# EAGLE board Cell_Board (EAGLE 5.08)
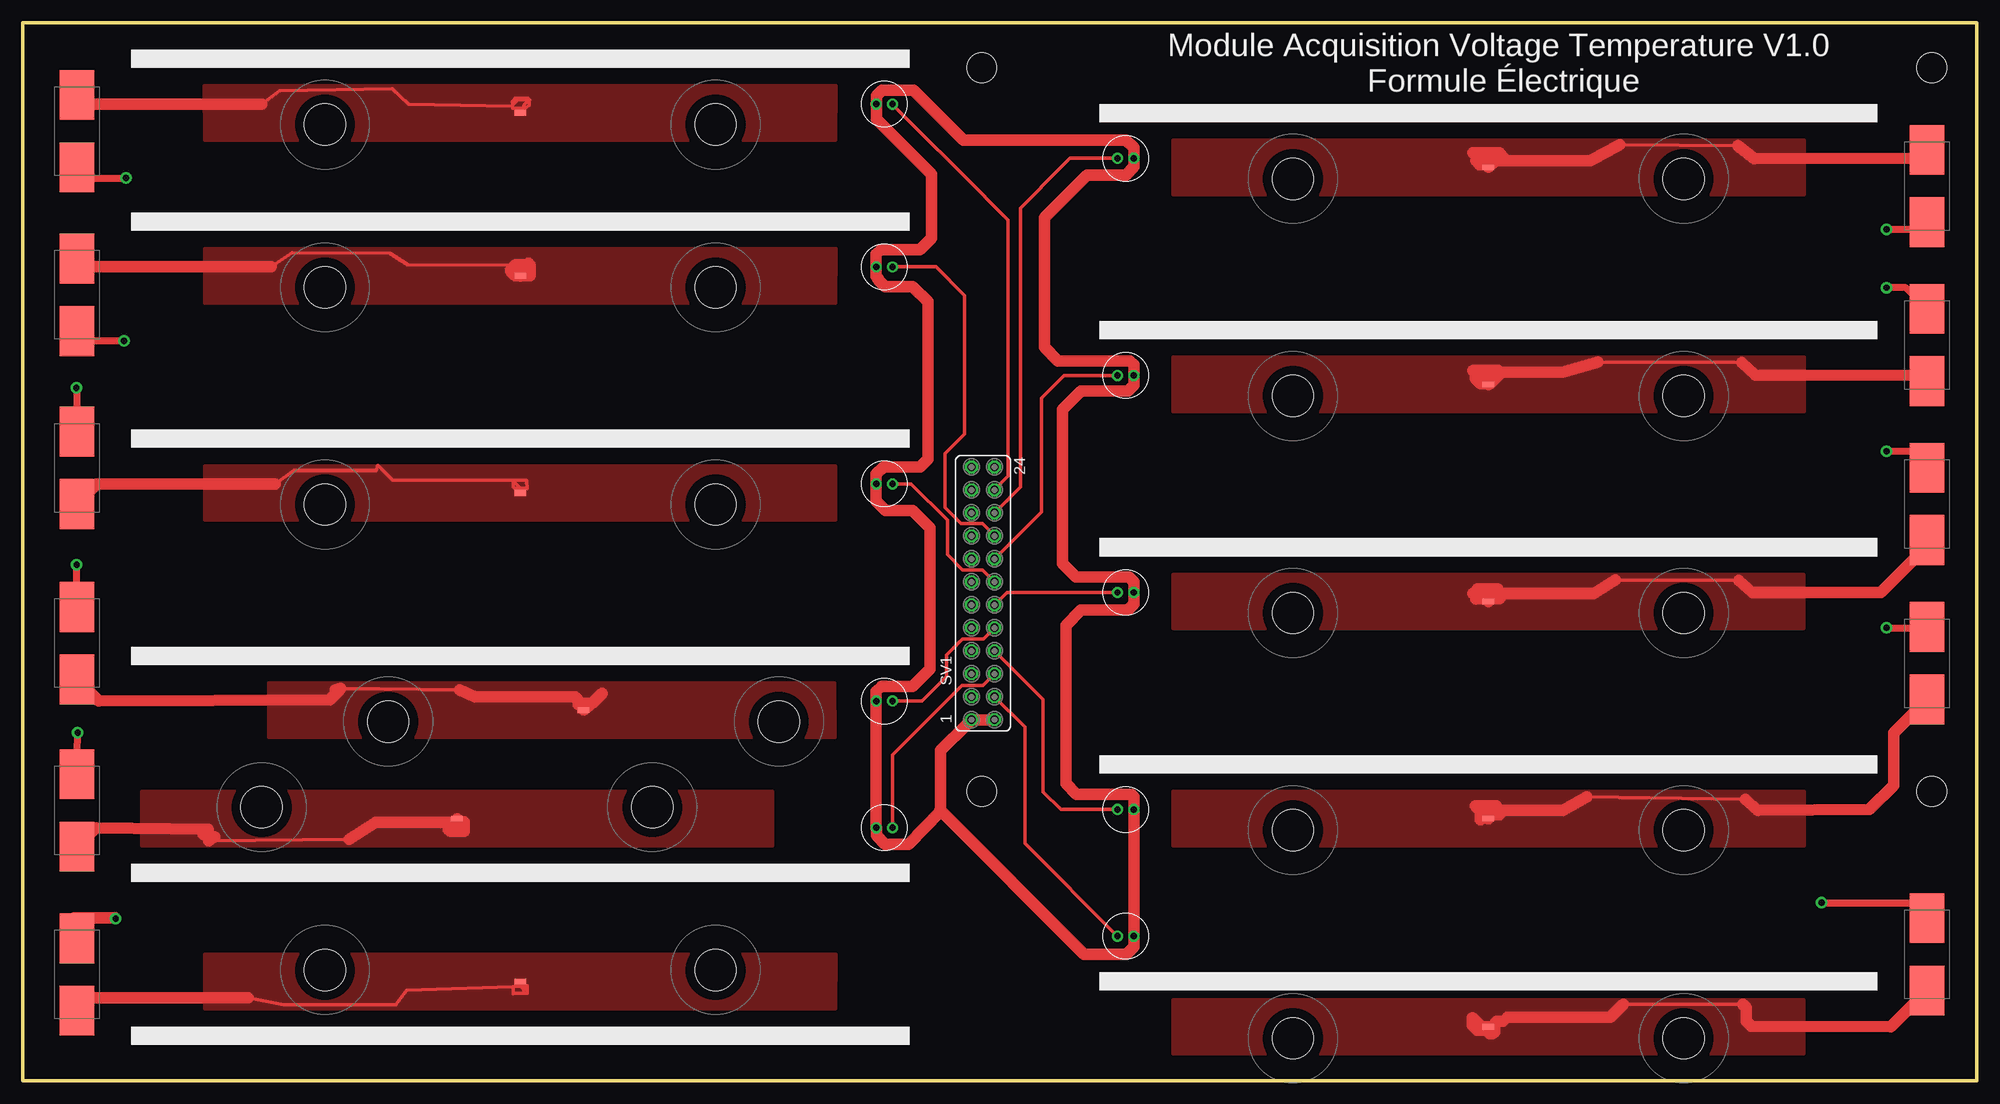
[diagram p0: board, top side]
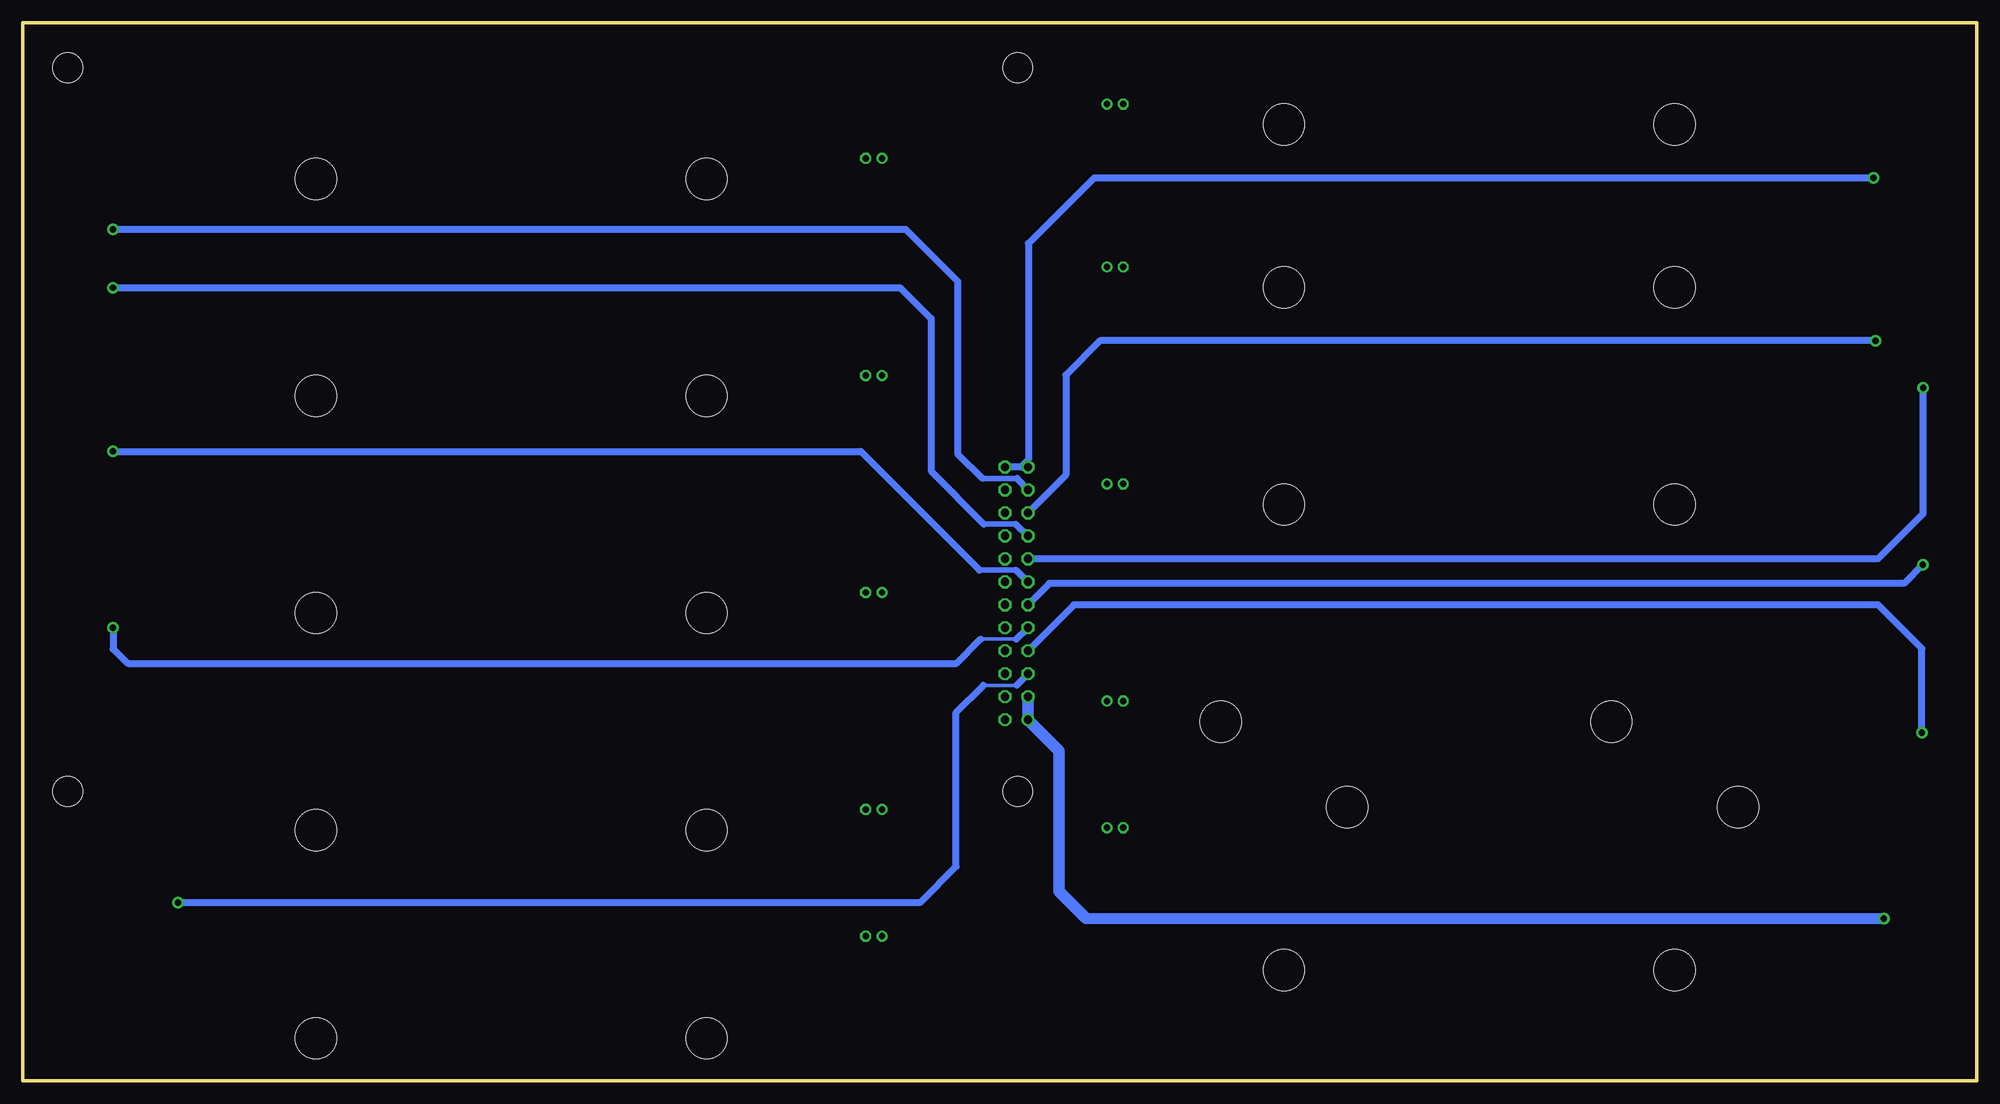
[diagram p1: board, bottom side, seen from below]

Size 216 x 117 mm. Coordinates in mm from the lower left corner, seen from the top.
Outline: 0,0 216,0 216,117 0,117 0,0
Copper layers (1*16): Top 0.035mm / dielectric 1.5mm / Bottom 0.035mm
Design rules "default *": minimum track width 10mil, minimum drill 23mil, track to track 8mil, track to pad 8mil, pad to pad 8mil, via to via 8mil, smd to smd 8mil, copper to edge 40mil, drill to drill 8mil, minimum pad ring 10mil, minimum via ring 8mil, stop-mask expansion 4mil, vias tented up to drill 0mil, thermal gap 10mil

## Footprints (pad centres in the part's own frame; a part is rotated, then mirrored left to right if it is on the bottom)
FE12-2 = drill 0.914 round: 1 -13.97,1.27 | drill 0.914 octagon: 2 -13.97,-1.27; 3 -11.43,1.27; 4 -11.43,-1.27; 5 -8.89,1.27; 6 -8.89,-1.27; 7 -6.35,1.27; 8 -6.35,-1.27; 9 -3.81,1.27; 10 -3.81,-1.27; 11 -1.27,1.27; 12 -1.27,-1.27; 13 1.27,1.27; 14 1.27,-1.27; 15 3.81,1.27; 16 3.81,-1.27; 17 6.35,1.27; 18 6.35,-1.27; 19 8.89,1.27; 20 8.89,-1.27; 21 11.43,1.27; 22 11.43,-1.27; 23 13.97,1.27; 24 13.97,-1.27
STAND-OFF = hole 3.302: 0,0
FUSEBLOCK = smd 5.5 x 3.81: PAD1 -4,0; PAD2 4,0
CELLPAD = smd 1.27 x 0.635: PAD 0,0 | hole 4.572: -21.59,-1.27; 21.59,-1.27
CELLPAD2 = smd 1.27 x 0.635: PAD 0,0 | hole 4.572: -21.59,-1.27; 21.59,-1.27
TERMISTANCE-JT = drill 0.7 octagon: PIN1 -0.9,0 | drill 0.7 round: PIN2 0.9,0

## Placement (x,y rotation side)
SV1  [FE12-2]  106.15,53.91 90 top
U$1  [STAND-OFF]  106,32 0 top
U$2  [STAND-OFF]  106,112 0 top
U$3  [STAND-OFF]  211,32 0 top
U$4  [STAND-OFF]  211,112 0 top
U$5  FUSEBLOCK  [FUSEBLOCK]  6,11.78 270 top
U$6  FUSEBLOCK  [FUSEBLOCK]  210.5,14 270 top
U$7  FUSEBLOCK  [FUSEBLOCK]  6,29.91 270 top
U$8  FUSEBLOCK  [FUSEBLOCK]  210.5,46.18 270 top
U$9  FUSEBLOCK  [FUSEBLOCK]  6,48.4 270 top
U$10  FUSEBLOCK  [FUSEBLOCK]  210.5,63.79 270 top
U$11  FUSEBLOCK  [FUSEBLOCK]  6,67.78 270 top
U$12  FUSEBLOCK  [FUSEBLOCK]  210.5,81.36 270 top
U$13  FUSEBLOCK  [FUSEBLOCK]  6,86.91 90 top
U$14  FUSEBLOCK  [FUSEBLOCK]  210.5,98.93 90 top
U$15  FUSEBLOCK  [FUSEBLOCK]  6,105 90 top
U$16  CELLPAD  [CELLPAD]  55,107 0 top
U$17  CELLPAD  [CELLPAD]  162,101 0 top
U$18  CELLPAD  [CELLPAD]  55,89 0 top
U$19  CELLPAD  [CELLPAD]  162,77 0 top
U$20  CELLPAD  [CELLPAD]  55,65 0 top
U$21  CELLPAD  [CELLPAD]  162,53 0 top
U$22  CELLPAD2  [CELLPAD2]  62,41 0 top
U$23  CELLPAD  [CELLPAD]  162,29 0 top
U$24  CELLPAD  [CELLPAD]  48,29 180 top
U$25  CELLPAD  [CELLPAD]  162,6 0 top
U$26  CELLPAD  [CELLPAD]  55,11 180 top
U$27  [TERMISTANCE-JT]  121.92,16 180 top
U$28  [TERMISTANCE-JT]  95.25,28 0 top
U$29  [TERMISTANCE-JT]  121.92,30 180 top
U$30  [TERMISTANCE-JT]  95.25,42 0 top
U$31  [TERMISTANCE-JT]  121.92,54 180 top
U$32  [TERMISTANCE-JT]  95.25,66 0 top
U$33  [TERMISTANCE-JT]  121.92,78 180 top
U$34  [TERMISTANCE-JT]  95.25,90 0 top
U$35  [TERMISTANCE-JT]  121.92,102 180 top
U$36  [TERMISTANCE-JT]  95.25,108 0 top

## Library data of the parts
SV1 = con-lsta
U$1-U$4 = SparkFun
U$5-U$15 = fuse
U$16-U$36 = mylibrary

## Nets
N$1: SV1.1 SV1.2 SV1.3 U$5.PAD1 U$27.PIN1 U$28.PIN1 U$29.PIN1 U$30.PIN1 U$31.PIN1 U$32.PIN1 U$33.PIN1 U$34.PIN1 U$35.PIN1 U$36.PIN1
N$2: SV1.5 U$6.PAD1
N$3: SV1.7 U$7.PAD1
N$4: SV1.9 U$8.PAD1
N$5: SV1.11 U$9.PAD1
N$6: SV1.13 U$10.PAD1
N$7: SV1.15 U$11.PAD1
N$8: SV1.17 U$12.PAD1
N$9: SV1.19 U$13.PAD1
N$10: SV1.21 U$14.PAD1
N$11: SV1.23 SV1.24 U$15.PAD1
N$13: U$15.PAD2 U$16.PAD
N$14: U$14.PAD2 U$17.PAD
N$16: U$13.PAD2 U$18.PAD
N$17: U$12.PAD2 U$19.PAD
N$18: U$11.PAD2 U$20.PAD
N$19: U$10.PAD2 U$21.PAD
N$20: U$9.PAD2 U$22.PAD
N$21: U$8.PAD2 U$23.PAD
N$22: U$7.PAD2 U$24.PAD
N$23: U$6.PAD2 U$25.PAD
N$33: SV1.4 U$27.PIN2
N$34: SV1.6 U$28.PIN2
N$35: U$5.PAD2 U$26.PAD
N$36: SV1.8 U$29.PIN2
N$37: SV1.10 U$30.PIN2
N$38: SV1.12 U$31.PIN2
N$39: SV1.14 U$32.PIN2
N$40: SV1.16 U$33.PIN2
N$41: SV1.18 U$34.PIN2
N$42: SV1.20 U$35.PIN2
N$43: SV1.22 U$36.PIN2

## Tracks (layer width: path | path; a pad name or v marks a point on that pad's centre or on a via)
N$1  (via drill 0.7 pad 1.27)
  Top 0.762: 10.25,18.01 v10.29,17.94
  Top 1.27: U$5.PAD1 5.72,18.02 10.25,18.01 | 101.4,29.95 117.33,14.02 121.99,14.02 122.82,14.85 U$27.PIN1 U$29.PIN1 122.82,31.43 122.56,31.69 116.49,31.69 115.3,32.88 115.3,50.38 116.99,52.07 122.16,52.07 122.84,52.75 122.84,53.98 U$31.PIN1 122.82,55.18 122.27,55.73 116.43,55.73 114.96,57.2 114.96,74.25 116.99,76.28 122.17,76.28 122.84,76.95 122.84,77.98 U$33.PIN1 122.82,79.17 122.39,79.6 114.45,79.6 112.93,81.12 112.93,95.42 117.66,100.15 121.94,100.15 122.84,101.05 122.84,101.98 U$35.PIN1 122.82,103.15 121.94,104.03 103.99,104.03 98.47,109.55 94.98,109.55 94.36,108.93 U$36.PIN1 94.36,106.34 100.44,100.26 100.44,93.17 99.2,91.93 94.87,91.93 94.35,91.41 U$34.PIN1 94.31,89.96 94.31,88.95 94.53,88.73 94.53,88.61 95.32,87.82 98.36,87.82 100.05,86.13 100.05,68.74 99.2,67.89 95.15,67.89 94.35,67.09 U$32.PIN1 94.31,65.96 94.31,64.12 95.38,63.05 98.36,63.05 100.27,61.14 100.27,45.54 98.36,43.63 94.93,43.63 94.35,43.05 U$30.PIN1 U$28.PIN1 94.36,27.13 95.31,26.18 97.91,26.18 101.44,29.81 101.45,36.52 104.38,39.44 SV1.1 SV1.2
  Bottom 1.27: v10.29,17.94 98.46,17.98 101.45,20.94 101.45,36.51 SV1.1 SV1.3
N$2  (via drill 0.7 pad 1.27)
  Top 0.762: v198.84,19.71 209.63,19.71 U$6.PAD1
  Bottom 0.381: 109.81,43.75 106.13,43.75
  Bottom 0.762: v198.84,19.71 116.84,19.7 112.82,23.72 112.82,40.76 109.81,43.75 | 106.13,43.75 SV1.5
N$3  (via drill 0.7 pad 1.27)
  Top 0.762: U$7.PAD1 v6.09,38.49
  Bottom 0.762: v6.09,38.49 6.09,47.79 10.92,52.62 99.82,52.62 SV1.7
N$4  (via drill 0.7 pad 1.27)
  Top 0.762: U$8.PAD1 210.5,50.09 v206,50.09
  Bottom 0.381: 110.12,48.84 106.15,48.84
  Bottom 0.762: v206,50.09 206,47.75 204.41,46.16 112.79,46.16 110.12,48.84 | 106.15,48.84 SV1.9
N$5  (via drill 0.7 pad 1.27)
  Top 0.762: U$9.PAD1 v5.98,57.07
  Bottom 0.762: SV1.11 102.52,55 8.05,55 v5.98,57.07
N$6  (via drill 0.7 pad 1.27)
  Top 0.762: U$10.PAD1 208.69,69.6 v206,69.6
  Bottom 0.61: 110.27,56.47 106.22,56.47
  Bottom 0.762: v206,69.6 123.35,69.6 110.27,56.47 | 106.22,56.47 SV1.13
N$7  (via drill 0.7 pad 1.27)
  Top 0.762: v5.93,76.63 6,76.56 U$11.PAD1
  Bottom 0.762: SV1.15 10.93,57.72 5.93,62.72 v5.93,76.63
N$8  (via drill 0.7 pad 1.27)
  Top 0.762: U$12.PAD1 208.16,87.7 v206,87.7
  Bottom 0.61: 109.77,61.55 106.24,61.55
  Bottom 0.762: v206,87.7 119,87.7 115.58,84.28 115.58,67.43 109.77,61.55 | 106.24,61.55 SV1.17
N$9  (via drill 0.7 pad 1.27)
  Top 0.762: U$13.PAD1 7.09,81.82 v11.2,81.82
  Bottom 0.762: v11.2,81.82 96.91,81.82 100.69,78.04 100.69,66.99 SV1.19
N$10  (via drill 0.7 pad 1.27)
  Top 0.762: U$14.PAD1 209.72,94.15 v206,94.15
  Bottom 0.61: 109.88,66.6 106.08,66.6
  Bottom 0.762: v206,94.15 118.4,94.15 112.65,88.4 112.65,69.31 109.88,66.6 | 106.08,66.6 SV1.21
N$11  (via drill 0.7 pad 1.27)
  Top 0.762: U$15.PAD1 7.18,99.82 v11.44,99.82
  Bottom 0.762: 105.65,67.88 SV1.23 | 105.65,67.88 SV1.24 | v11.44,99.82 97.58,99.82 104.83,92.57 104.83,68.7 105.65,67.88
N$13
  Top 0.406: 26.45,107.96 28.4,109.46 40.87,109.67 42.67,108 54.06,107.74 54.77,108.45 56.04,108.45 55.87,108.62 54.43,108.62 54.14,108.33 54.14,107.56 54.18,107.52 55.61,107.52 55.98,107.89 55.98,108.47 55.51,108 U$16.PAD
  Top 1.27: 26.45,107.96 7,108 U$15.PAD2
  pour Top: 89.88,110 89.87,104 20.14,104 20.06,110
N$14
  Top 0.406: 176.53,103.53 189.56,103.39
  Top 1.27: U$17.PAD 160.91,102 160.31,102.6 163.2,102.6 163.76,102.04 163.04,102.04 162.32,101.32 161.03,101.32 160.63,101.72 173.29,101.72 176.53,103.53 | 189.56,103.39 191.41,101.96 209.57,102 U$14.PAD2
  pour Top: 196.9,104 196.9,98 127.17,98 127.17,104
N$16
  Top 0.406: 27.49,90 29.77,91.56 40.57,91.52 42.58,90.22 56.11,90.17
  Top 1.27: 27.49,90 6.91,90 U$13.PAD2 | 56.11,90.17 56.11,89.05 54.43,89.05 53.95,89.53 53.95,89.69 54.51,90.25 55.79,90.25 55.95,90.41 55.95,89.85 54.19,89.85 U$18.PAD
  pour Top: 89.88,92 89.87,86 20.14,86 20.14,92
N$17
  Top 0.406: 190.02,79.4 174.13,79.46
  Top 1.27: 190.02,79.4 191.49,78.06 209.86,78 U$12.PAD2 | 174.13,79.46 170.26,78.38 160.55,78.38 160.55,77.65 161.11,77.09 162.24,77.09 163.36,78.21 163.36,78.3 163.12,78.54 160.31,78.54 160.85,78 U$19.PAD
  pour Top: 196.91,80 196.9,74 127.17,74 127.17,80
N$18
  Top 0.406: 27.9,66 29.98,67.5 39.1,67.5 39.24,68.02 39.31,68.02 40.91,66.42 55.7,66.37 55.76,65.48 55.04,65.48 54.22,66.3 54.22,65.69 54.4,65.51 54.69,65.51 54.73,65.47 U$20.PAD
  Top 1.27: U$11.PAD2 8.22,66 27.9,66
  pour Top: 89.87,68 89.86,62 20.13,62 20.13,68
N$19
  Top 0.406: 189.69,55.33 176.04,55.4
  Top 1.27: 189.69,55.33 191.17,53.99 205.38,54 210.59,59.21 210.59,59.7 U$10.PAD2 | 176.04,55.4 173.69,53.91 160.31,53.91 160.63,53.59 160.63,53.27 160.71,53.35 163.28,53.35 163.36,53.43 163.36,54.07 163.04,54.39 160.79,54.39 161.18,54 U$21.PAD
  pour Top: 196.87,56 196.86,50 127.13,50 127.13,56
N$20
  Top 0.406: 35.13,43.42 48.31,43.21
  Top 1.27: U$9.PAD2 8.4,42 33.91,42.12 35.03,43.24 34.53,43.24 35.13,43.42 | 48.31,43.21 50.01,42.44 61.08,42.44 61.4,42.12 61.4,41.63 61.48,41.71 62.92,41.71 63.21,42 | 63.21,42 64.05,42.84 | 63.21,42 U$22.PAD
  pour Top: 89.73,44 89.78,38 27.17,38 27.17,44
N$21
  Top 0.406: 172.89,31.41 190.38,31.13
  Top 1.27: U$23.PAD 160.95,30 160.55,30.4 162.88,30.4 162.96,30.32 162.96,29.68 163.2,29.44 161.67,29.44 161.11,28.88 161.11,29.84 161.03,29.92 170.25,29.92 172.89,31.41 | 190.38,31.13 191.81,29.92 204.12,30 206.81,32.69 206.81,38.49 U$8.PAD2
  pour Top: 196.91,32 196.9,26 127.17,26 127.17,32
N$22
  Top 0.406: 20.56,26.55 36.07,26.73
  Top 1.27: U$7.PAD2 8.09,28 20.52,27.84 19.96,27.28 21.21,26.97 20.56,26.55 | 36.07,26.73 39.04,28.56 47.77,28.56 47.05,27.84 47.29,27.6 48.82,27.6 48.82,28.64 48.18,28 U$24.PAD
  pour Top: 82.89,32 82.88,26 13.15,26 13.15,32
N$23
  Top 0.406: 176.91,8.5 190.13,8.5
  Top 1.27: U$6.PAD2 206.5,6 191.09,6.02 190.53,6.58 190.53,8.1 190.13,8.5 | U$25.PAD 161.21,6 160.23,6.98 160.23,6.18 160.79,5.62 161.75,5.62 162.16,5.21 162.47,5.21 162.72,5.46 162.72,6.34 162.96,6.58 163.6,6.58 164.08,7.06 175.47,7.06 176.91,8.5
  pour Top: 196.87,9 196.86,3 127.13,3 127.13,9
N$33
  Top 0.381: U$27.PIN2 110.77,26.25 110.77,39.13 SV1.4
N$34
  Top 0.381: U$28.PIN2 96.15,36.03 103.85,43.73 106.13,43.73 SV1.6
N$35
  Top 0.406: 24.91,9.22 28.86,8.43 41.24,8.43 42.46,10 55.78,10.47 55.75,10.5 54.41,10.5 54.2,10.29 54.2,9.62 54.25,9.67 55.74,9.67 55.78,9.71 55.78,10.38 55.4,10 U$26.PAD
  Top 1.27: 24.91,9.22 7.21,9.2 U$5.PAD2
  pour Top: 89.88,14 89.87,8 20.14,8 20.14,14
N$36
  Top 0.381: U$29.PIN2 114.76,30 112.78,31.98 112.78,42.2 SV1.8
N$37
  Top 0.381: U$30.PIN2 99.4,42 102.11,44.71 102.11,47.08 103.9,48.87 106.19,48.87 SV1.10
N$38
  Top 0.381: U$31.PIN2 108.78,54 SV1.12
N$39
  Top 0.381: U$32.PIN2 98.19,66 102.2,61.99 102.2,58.18 103.9,56.48 106.12,56.48 SV1.14
N$40
  Top 0.381: U$33.PIN2 115.1,78 112.61,75.51 112.61,62.91 SV1.16
N$41
  Top 0.381: U$34.PIN2 100.96,90 104.12,86.84 104.12,71.52 101.94,69.34 101.94,63.39 103.73,61.6 106.08,61.6 SV1.18
N$42
  Top 0.381: U$35.PIN2 115.77,102 112.56,98.79 112.56,98.78 110.29,96.51 110.29,65.67 SV1.20
N$43
  Top 0.381: U$36.PIN2 96.15,107.94 106.35,97.74 106.35,97.73 108.93,95.15 108.93,66.85 SV1.22

## Text on the board
tPlace: Module Acquisition Voltage Temperature V1.0 | Formule Électrique